# EAGLE board 2x3 (EAGLE 8.7.0)

Size 76.2 x 50.8 mm. Coordinates in mm from the lower left corner, seen from the top.
Copper layers (1*16): Top 0.035mm / dielectric 1.5mm / Bottom 0.035mm
Design rules "default": minimum track width 10mil, minimum drill 24mil, track to track 8mil, track to pad 8mil, pad to pad 8mil, via to via 8mil, smd to smd 8mil, copper to edge 40mil, drill to drill 8mil, minimum pad ring 10mil, minimum via ring 8mil, stop-mask expansion 4mil, vias tented up to drill 0mil, thermal gap 10mil

## Footprints (pad centres in the part's own frame; a part is rotated, then mirrored left to right if it is on the bottom)
2X3_BOARD = smd 1 x 1: P$1 72.7,47.3; P$3 3.5,3.5 | smd 1 x 1 bottom: P$2 72.7,47.3; P$4 3.5,3.5

## Placement (x,y rotation side)
E$2  [2X3_BOARD]  0,0 0 top

## Library data of the parts
E$2 = voltera_EAGLE_community_lib